# EAGLE board Alarme analógico Residencial (EAGLE 9.7.0)

Size 371.28 x 93.14 mm. Coordinates in mm from the lower left corner, seen from the top.
Outline: 0,0 371.28,0 371.28,93.14 0,93.14 0,0
Copper layers (1*16): Top 0.035mm / dielectric 1.5mm / Bottom 0.035mm
Design rules "default": minimum track width 6mil, minimum drill 0.35mm, track to track 6mil, track to pad 6mil, pad to pad 6mil, via to via 6mil, smd to smd 6mil, copper to edge 40mil, drill to drill 6mil, minimum pad ring 10mil, minimum via ring 8mil, stop-mask expansion 4mil, vias tented up to drill 0mil, thermal gap 10mil

## Footprints (pad centres in the part's own frame; a part is rotated, then mirrored left to right if it is on the bottom)
BATTERY-GENERIC = drill 1.118 pad 3.15 octagon: + 2.54,0; - -2.54,0
CAPPRD254W65D500H1150B = drill 0.85 pad 1.45: 1 -1.27,0; 2 1.27,0
LEDRD254W60D565H860B = drill 0.981 pad 1.581: 1 -1.27,0; 2 1.27,0
DIODE-AXIAL = drill 1: 1 -5.08,0; 2 5.08,0
LEDRD254W60D565H860B_B = drill 0.981 pad 1.581: 1 -1.27,0; 2 1.27,0
LEDRD254W60D565H860B_G = drill 0.981 pad 1.581: 1 -1.27,0; 2 1.27,0
LU-5-R = drill 0.8: 1 -6.35,-3.81; 5 3.81,-3.81; 6 6.35,-3.81; 7 6.35,3.81; 8 3.81,3.81; 12 -6.35,3.81
1X02 = drill 1.016 long: 1 -1.27,0; 2 1.27,0
PIEZO = drill 1 pad 1.6: 1 -3.5,0; 2 3.5,0
28027 = drill 1.016 long: 1 -2.54,0; 2 0,0; 3 2.54,0
RESAD1016W63L850D250B = drill 0.83 pad 1.43: 1 -5.08,0; 2 5.08,0
HA-06-SM065 = drill 1 pad 1.676: 1 -2.54,-2.54; 2 0,2.54; 3 2.54,-2.54
SWITCH-SPDT-PTH-8.5X3.7MM = drill 1.016 pad 1.88: 1 -2.54,0; 2 0,0; 3 2.54,0
TO92 = drill 0.813 octagon: 1 -1.27,0; 2 0,1.905; 3 1.27,0
TO220V = drill 1.016 long: 1 -2.54,-2.54; 2 0,-2.54; 3 2.54,-2.54
DIP826W53P254L959H508Q8B = drill 0.786 pad 1.386: 1 -4.13,3.81; 2 -4.13,1.27; 3 -4.13,-1.27; 4 -4.13,-3.81; 5 4.13,-3.81; 6 4.13,-1.27; 7 4.13,1.27; 8 4.13,3.81

## Placement (x,y rotation side)
BAT1  9V  [BATTERY-GENERIC]  329.44,68.91 0 top
CCAPACITOR_ELETROLÍTICO  2200u  [CAPPRD254W65D500H1150B]  93.65,65.38 180 top
D1  RED  [LEDRD254W60D565H860B]  72.04,82.53 180 top
DDIODO_1N4007  DIODEDIODE-AXIAL  [DIODE-AXIAL]  178.64,49.21 90 top
DLED_DISPARO  BLUE  [LEDRD254W60D565H860B_B]  238.99,42.96 270 top
DLED_ON  GREEN  [LEDRD254W60D565H860B_G]  239.08,48.11 90 top
KRÉLE_5V  RELAY-SPDT_LU-5-R  [LU-5-R]  207.18,45.69 0 top
L1  LIGHTBULB  [1X02]  365.57,27.09 0 top
P1  BATTERYGENERIC  [BATTERY-GENERIC]  8.26,74.38 180 top
PIEZOBUZZER  PIEZO  [PIEZO]  253.79,13.58 180 top
PIRSENSOR  PIR-SENSOR_28027  [28027]  241.39,86.79 0 top
R1  1k  [RESAD1016W63L850D250B]  106.26,39.28 90 top
R2  1k  [RESAD1016W63L850D250B]  73.31,77.45 90 top
R3  1k  [RESAD1016W63L850D250B]  291.57,28.25 90 top
RPOTPOTENCIOMETRO1  10k  [HA-06-SM065]  124.24,32.66 0 top
RR1  3k  [RESAD1016W63L850D250B]  96.19,60.3 270 top
RR2  10  [RESAD1016W63L850D250B]  79.94,60.43 90 top
RR5  100  [RESAD1016W63L850D250B]  200.14,20.88 90 top
RR6  1k  [RESAD1016W63L850D250B]  228.85,49.33 0 top
RR51  1k  [RESAD1016W63L850D250B]  229.29,41.77 0 top
S1  TOGGLE  [SWITCH-SPDT-PTH-8.5X3.7MM]  234.75,24.51 270 top
SINTERRUPTOR_DESLIZANTE  TOGGLE  [SWITCH-SPDT-PTH-8.5X3.7MM]  60.69,68.57 0 top
T1  NMOSFET  [TO92]  300.71,38.67 90 top
T2  NPN  [TO92]  116.92,50.55 0 top
TTRANSISTOR1  NPN  [TO92]  200.14,25.96 0 top
U1  LM7805_TO220V  [TO220V]  30.3,53.25 0 top
UCOMPARADOR_LM393  LM393_DIP  [DIP826W53P254L959H508Q8B]  76.67,39.34 90 top

## Library data of the parts
BAT1 CCAPACITOR_ELETROLÍTICO DDIODO_1N4007 KRÉLE_5V L1 P1 PIEZOBUZZER PIRSENSOR R1-R3 RPOTPOTENCIOMETRO1 RR1 RR2 RR5 RR6 RR51 S1 SINTERRUPTOR_DESLIZANTE U1 UCOMPARADOR_LM393 = Tinkercad
D1 = Tinkercad; CATEGORY: Opto-Electronic; SUB-CATEGORY: LED; VALUE: LED_RED
DLED_DISPARO = Tinkercad; CATEGORY: Opto-Electronic; SUB-CATEGORY: LED; VALUE: LED_BLUE
DLED_ON = Tinkercad; CATEGORY: Opto-Electronic; SUB-CATEGORY: LED; VALUE: LED_GREEN
T1 = Tinkercad; CATEGORY: Transistor; SUB-CATEGORY: MOSFET; TYPE: N-Channel
T2 TTRANSISTOR1 = Tinkercad; CATEGORY: Transistor; SUB-CATEGORY: BJT; TYPE: NPN

## Nets
BAT1+: BAT1.+ L1.2
BAT1-: BAT1.- PIEZOBUZZER.2 R3.1 S1.3 T1.3
D1_A: D1.1 R2.2
DLED_DISPARO_C: DLED_DISPARO.2 RR51.2
DLED_ON_C: DLED_ON.2 RR6.2
KRÉLE_5V_NC: KRÉLE_5V.7 RR6.1
L1_1: L1.1 T1.1
P1+: P1.+ U1.1
P1-: P1.- SINTERRUPTOR_DESLIZANTE.1 U1.2
PIRSENSOR_GND: CCAPACITOR_ELETROLÍTICO.2 D1.2 PIRSENSOR.3 RPOTPOTENCIOMETRO1.1 SINTERRUPTOR_DESLIZANTE.2 T2.1 UCOMPARADOR_LM393.4
PIRSENSOR_OUT: PIRSENSOR.1 RR5.1
PIRSENSOR_VCC: DDIODO_1N4007.2 DLED_DISPARO.1 DLED_ON.1 KRÉLE_5V.8 PIEZOBUZZER.1 PIRSENSOR.2 R1.1 R2.1 R3.2 RPOTPOTENCIOMETRO1.3 RR1.2 RR2.1 T1.2 U1.3 UCOMPARADOR_LM393.8
S1_P: KRÉLE_5V.5 KRÉLE_5V.6 RR51.1 S1.2 TTRANSISTOR1.3
SINTERRUPTOR_DESLIZANTE_S: RR2.2 SINTERRUPTOR_DESLIZANTE.3
T2_E: DDIODO_1N4007.1 KRÉLE_5V.1 KRÉLE_5V.12 T2.3 TTRANSISTOR1.1
TTRANSISTOR1_B: RR5.2 TTRANSISTOR1.2
UCOMPARADOR_LM393_+IN2: CCAPACITOR_ELETROLÍTICO.1 RR1.1 UCOMPARADOR_LM393.5
UCOMPARADOR_LM393_-IN2: RPOTPOTENCIOMETRO1.2 UCOMPARADOR_LM393.6
UCOMPARADOR_LM393_OUT2: R1.2 T2.2 UCOMPARADOR_LM393.7

## Tracks (layer width: path | path; a pad name or v marks a point on that pad's centre or on a via)
BAT1+  (1 unrouted)
BAT1-  (4 unrouted)
D1_A  (1 unrouted)
DLED_DISPARO_C  (1 unrouted)
DLED_ON_C  (1 unrouted)
KRÉLE_5V_NC  (1 unrouted)
L1_1  (1 unrouted)
P1+  (1 unrouted)
P1-  (2 unrouted)
PIRSENSOR_GND  (6 unrouted)
PIRSENSOR_OUT  (1 unrouted)
PIRSENSOR_VCC  (14 unrouted)
S1_P  (4 unrouted)
SINTERRUPTOR_DESLIZANTE_S  (1 unrouted)
T2_E  (4 unrouted)
TTRANSISTOR1_B  (1 unrouted)
UCOMPARADOR_LM393_+IN2  (2 unrouted)
UCOMPARADOR_LM393_-IN2  (1 unrouted)
UCOMPARADOR_LM393_OUT2  (2 unrouted)